# Altium PCB Cubit3_main_pcb.PcbDoc (part 1 of 4)
Units mm, origin at the board's own origin, x right, y up, seen from the top; angles counter-clockwise.
Board outline 58.47 x 70 mm, 4 copper layers (Top Layer, Layer 2, Layer 3, Bottom Layer), stack 0.602 mm thick; 134 components, 100 nets, 451 pads, 313 vias.
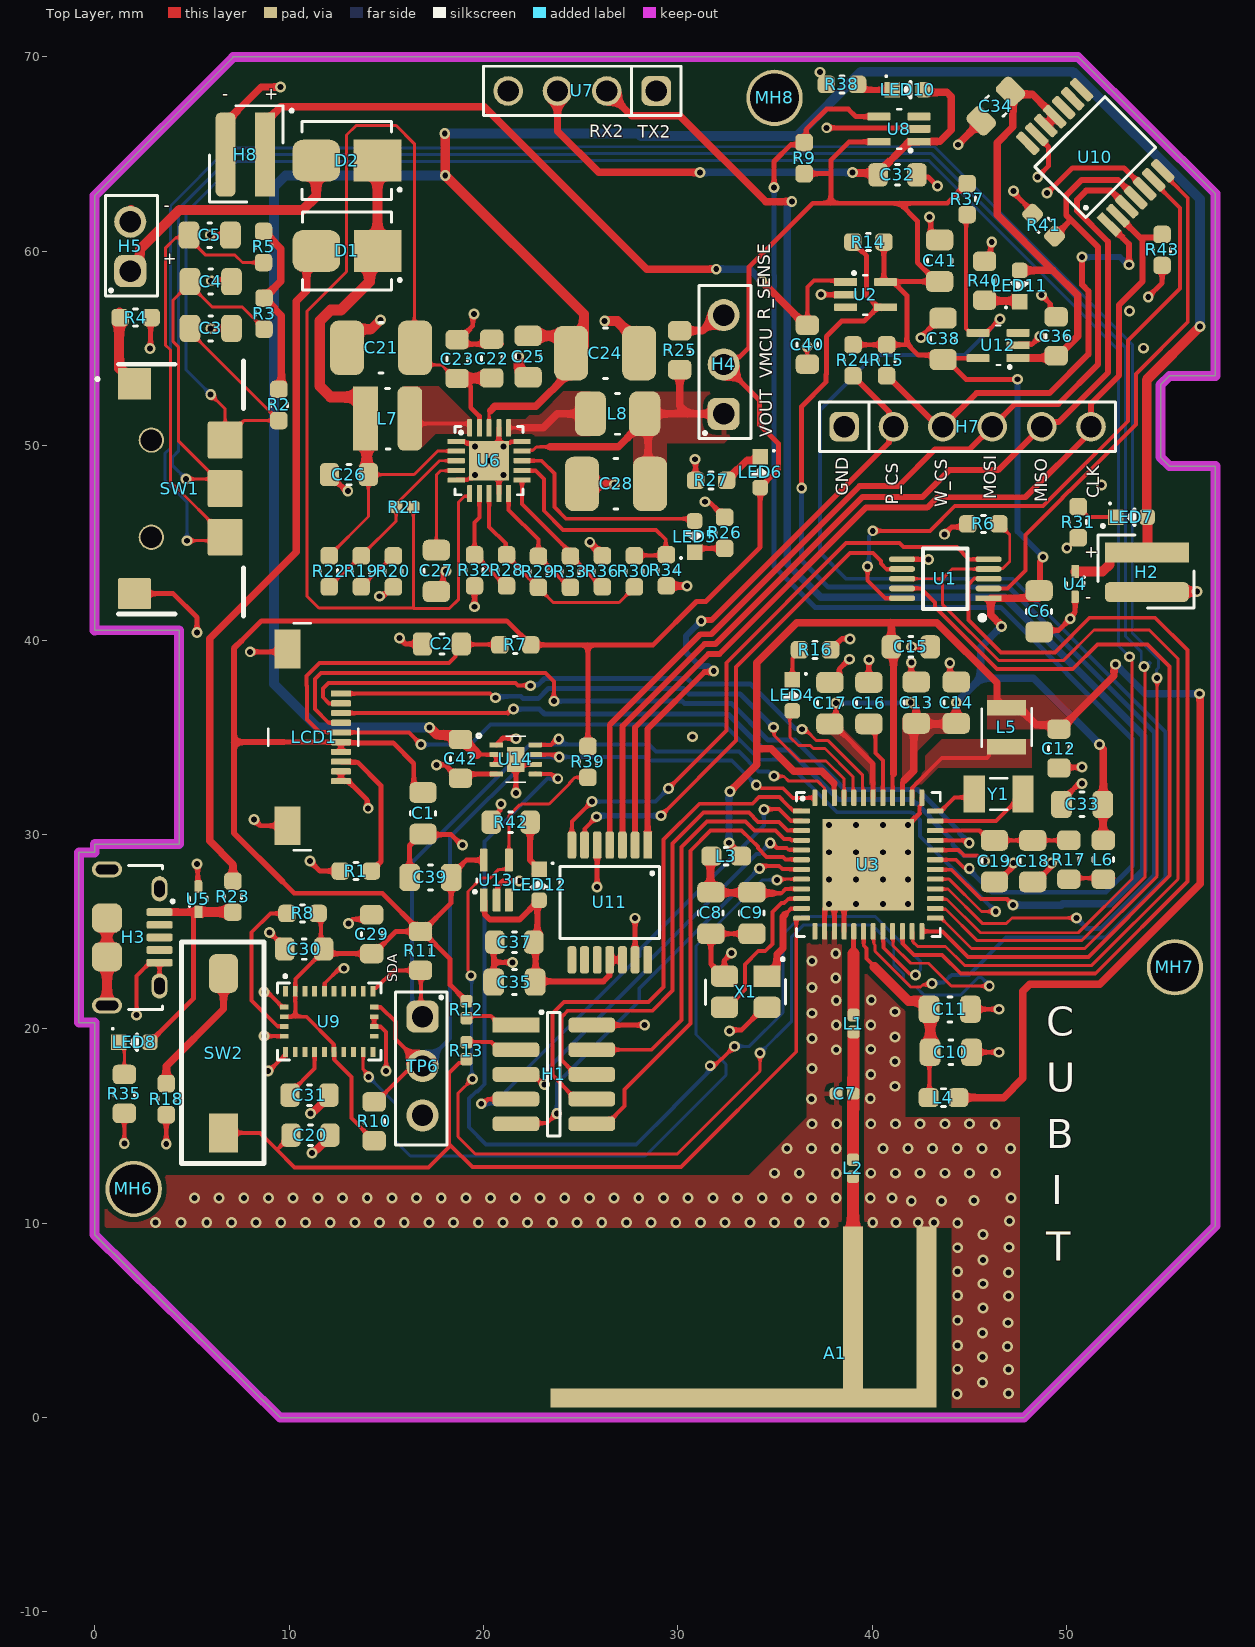
[diagram p0: Top Layer view]
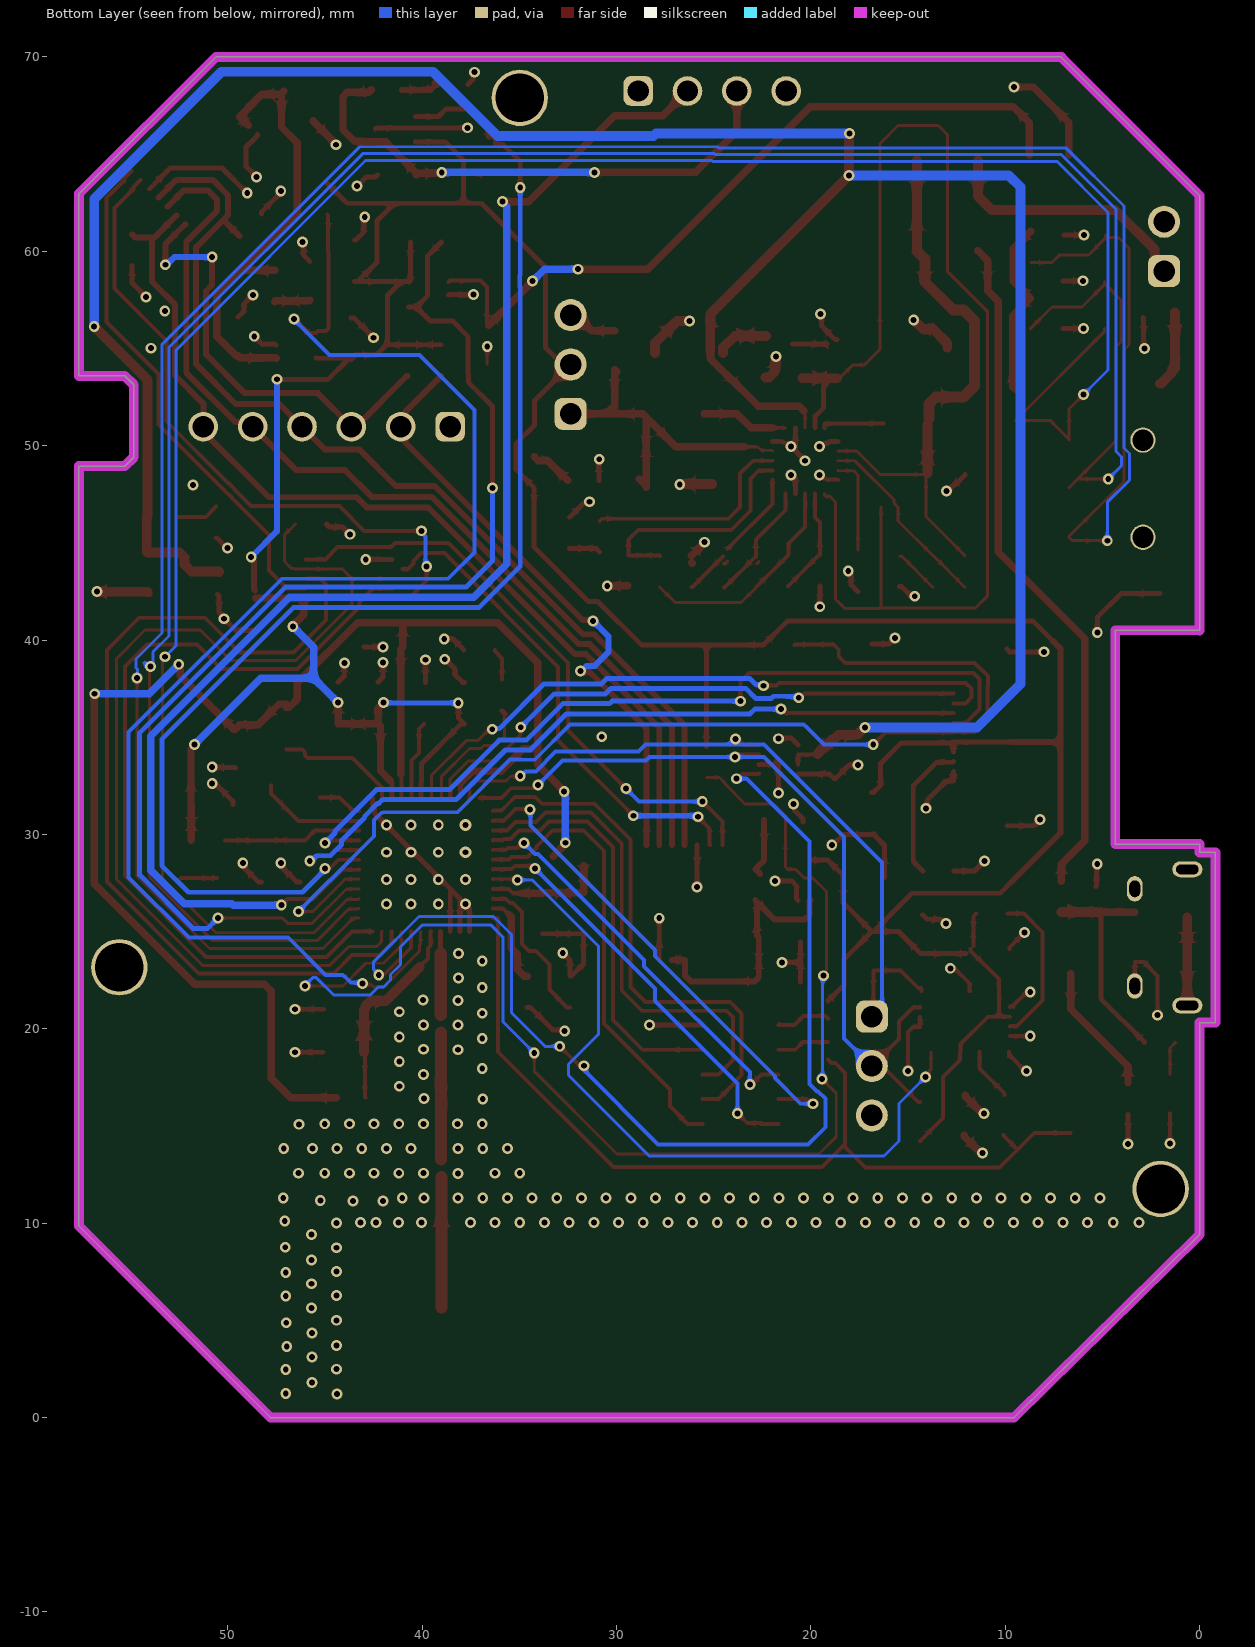
[diagram p1: Bottom Layer view, seen from below]
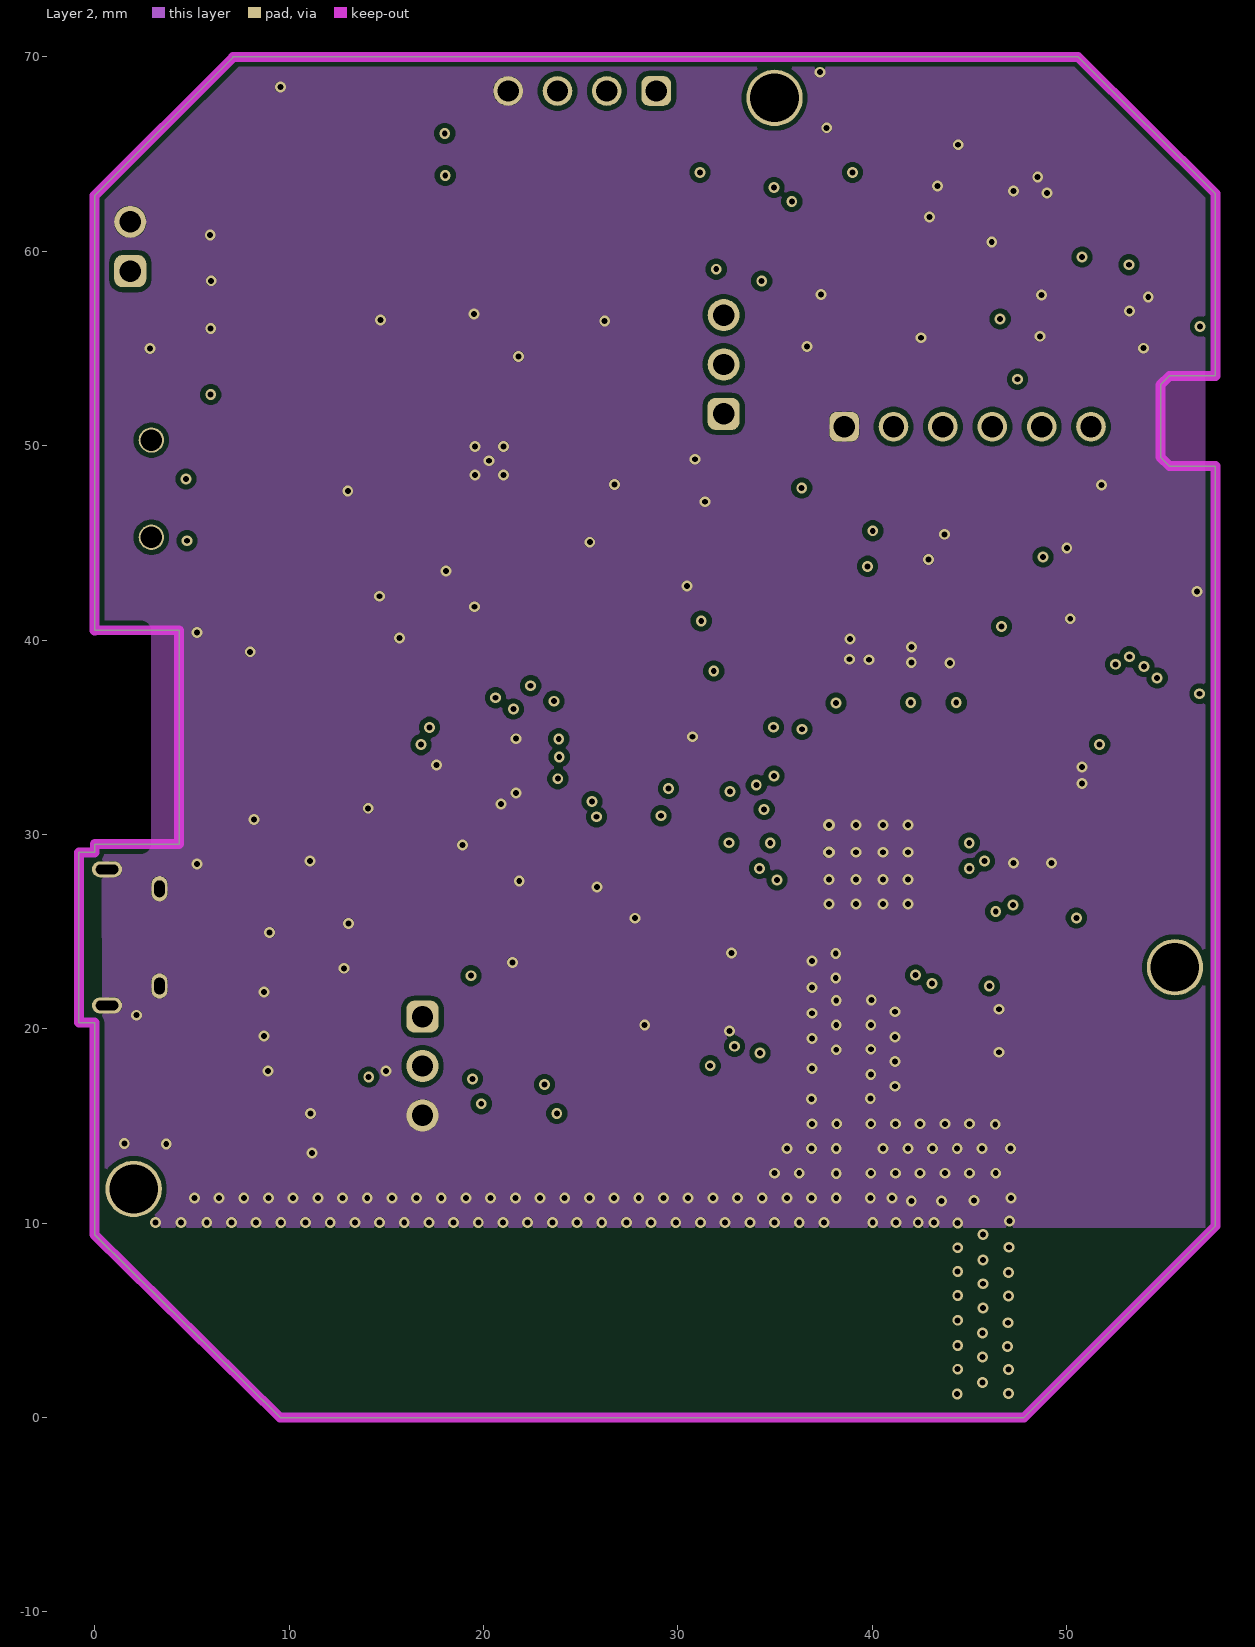
[diagram p2: Layer 2]
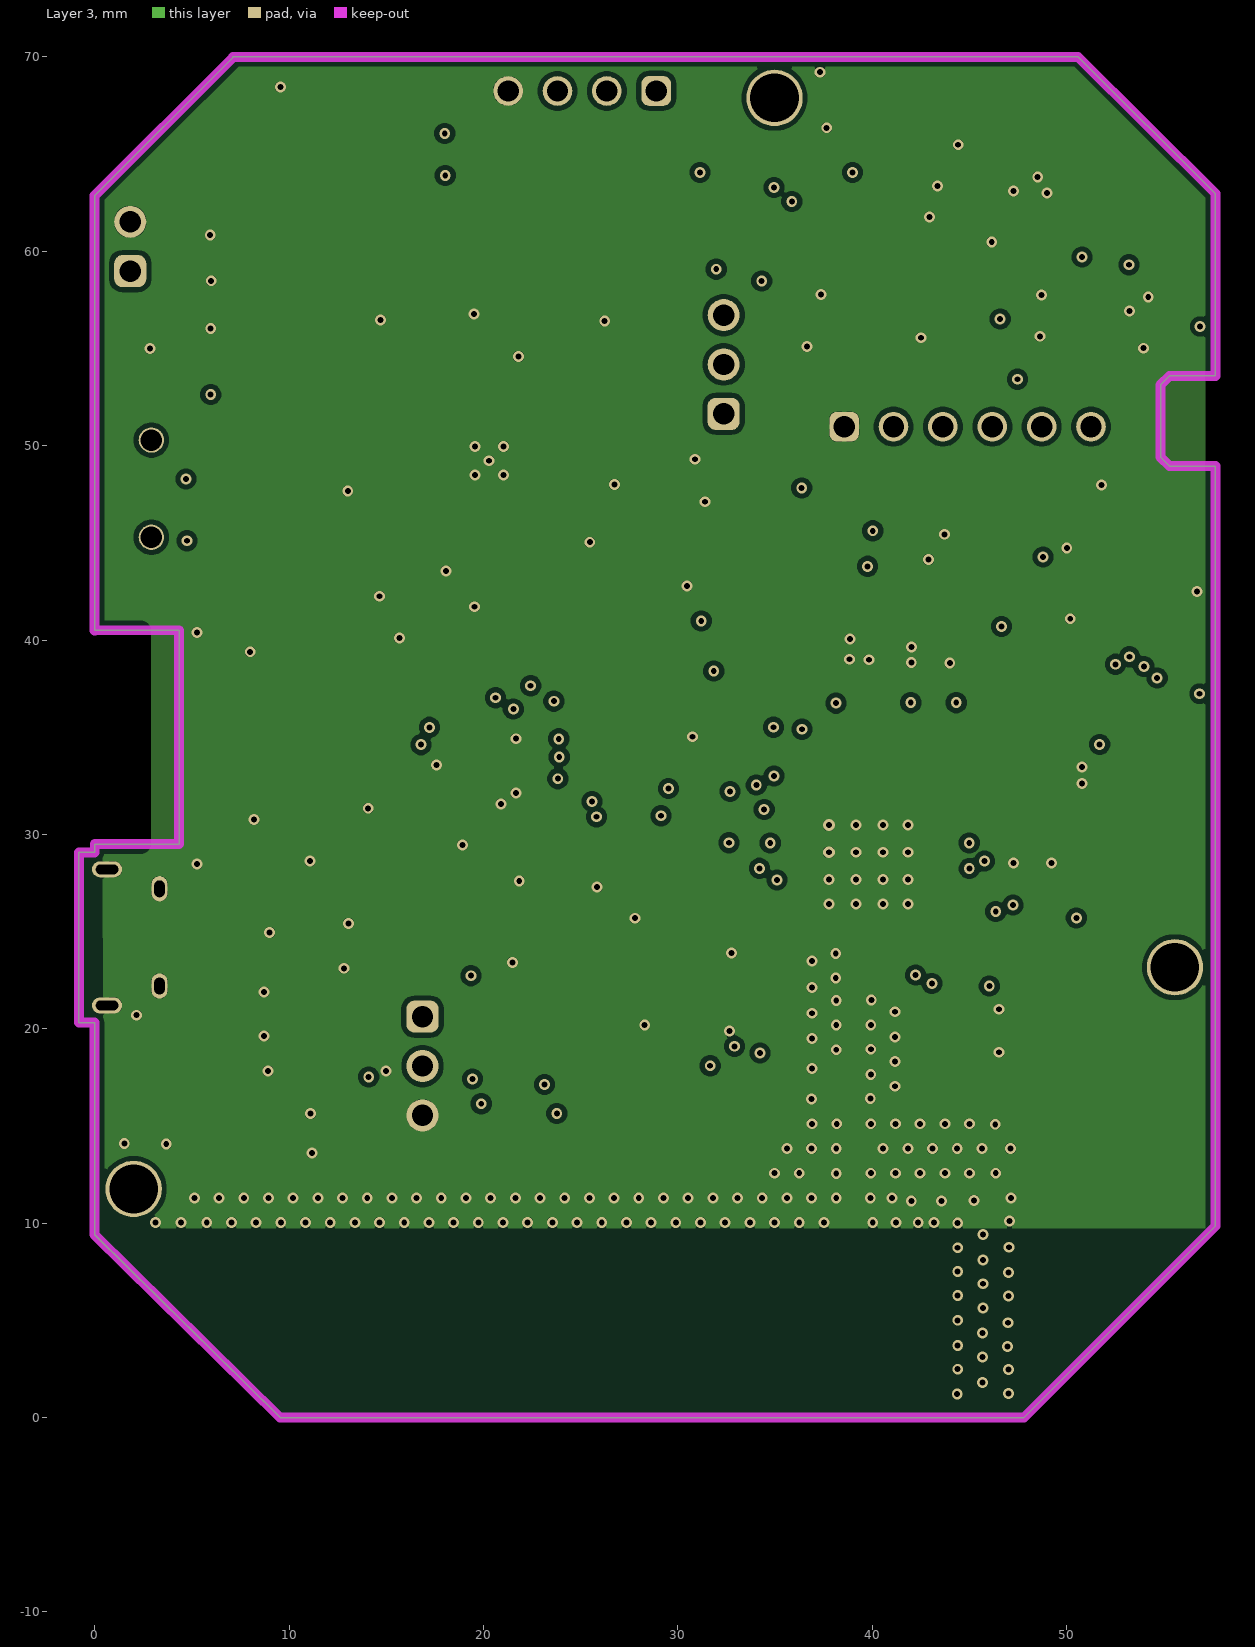
[diagram p3: Layer 3]
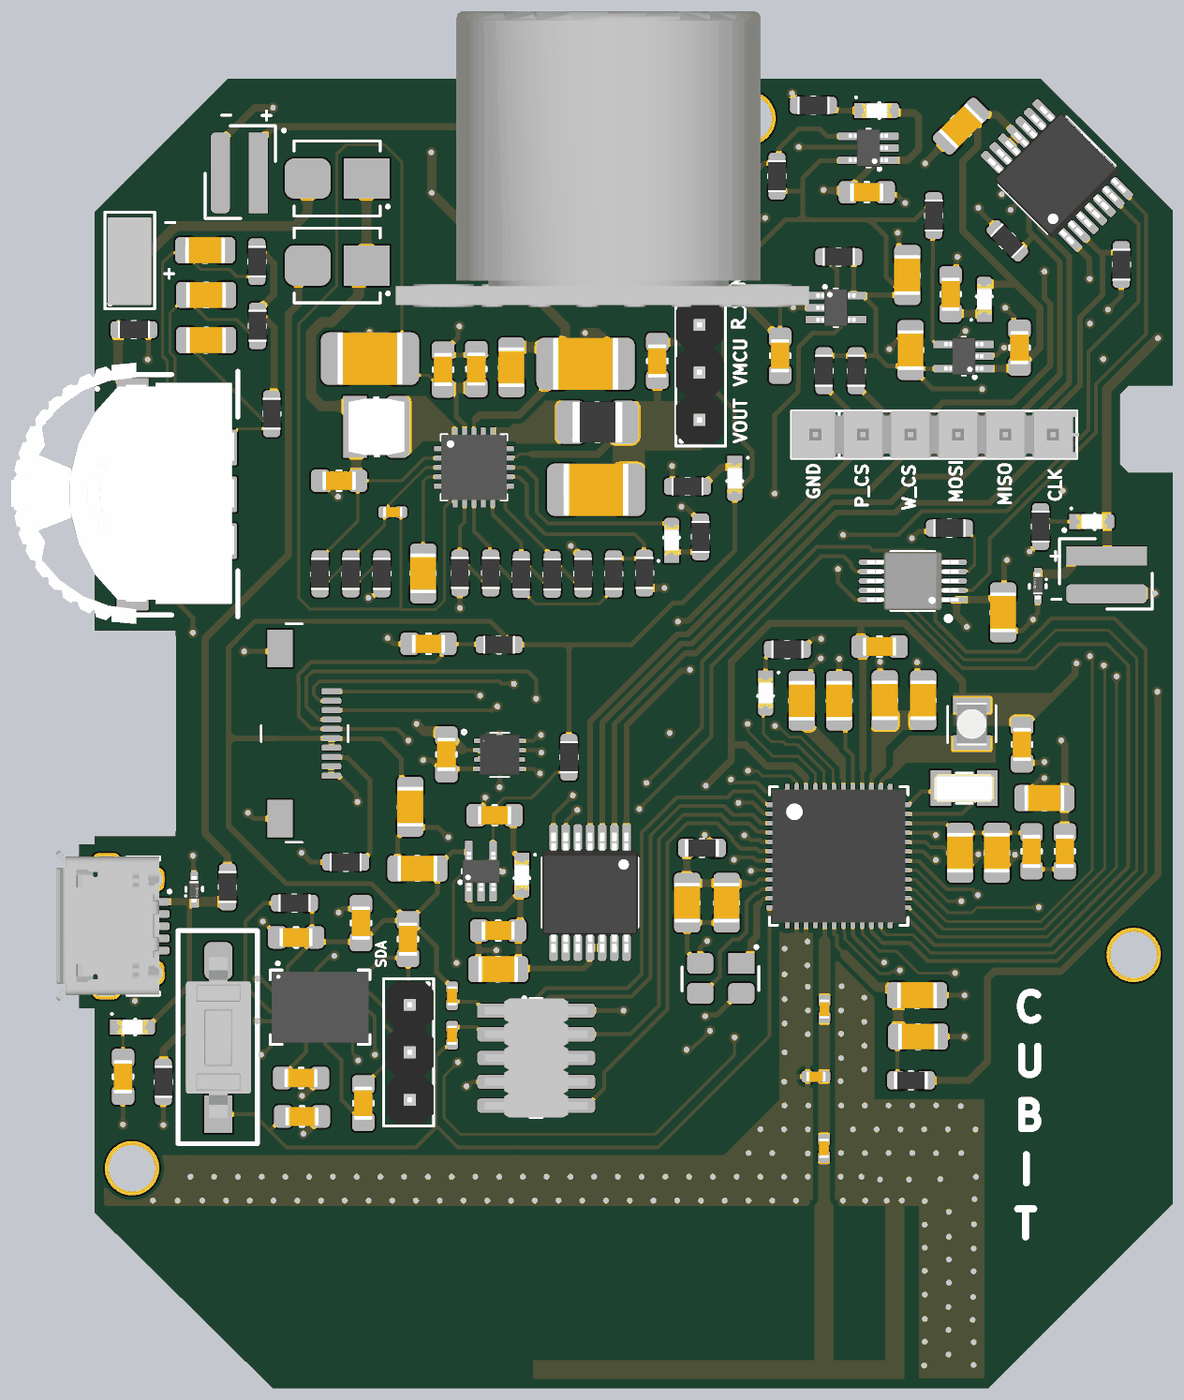
[diagram p5: 3D render of the assembled board from above, using the file's embedded part models]

## Layer stack, top to bottom
Top Solder: solder mask 0.0254, SM-001, Dk 4
Top Layer: signal copper 0.035
Dielectric 1: prepreg 0.0711, PP-006, Dk 4.1
Layer 2: signal copper 0.035
Dielectric 3: core 0.32, Core-004, Dk 4.2
Layer 3: signal copper 0.035
Dielectric 5: prepreg 0.0711, PP-006, Dk 4.1
Bottom Layer: signal copper 0.035
Bottom Solder: solder mask 0.0254, SM-001, Dk 4

## Board outline
0,9.405 0,20.32 -0.813,20.32 -0.813,29.078 0,29.078 0,29.5 4.343,29.5 4.343,40.506 0.008,40.492 0,40.492 0,62.865 7.112,69.977 7.112,70.002 50.546,70.002 50.597,70.002 57.658,62.967 57.658,53.594 55.296,53.594 54.839,53.137 54.839,49.403 55.296,48.946 57.658,48.946 57.658,9.855 47.803,0 9.543,0

## Design rules (kind name [scope] priority, off if disabled: settings)
Clearance [All] p1: gap=0.254 ignorepadtopadclearanceinfootprint=TRUE except(0: Arc-Hole Track-Hole SMDPad-Hole THPad-Hole Via-Hole Fill-Hole Poly-Hole Region-Hole Text-Hole; 0.203: Arc-Arc Arc-Track Track-Track)
PolygonConnect [All vs IsNamedPolygon('FEED_L01_P019')] p1: thpad.connectstyle=Direct thpad.reliefconductorwidth=0.254 thpad.reliefentries=4 thpad.polygonreliefangle="90 Angle" thpad.airgapwidth=0.254 smdpad.connectstyle=Direct smdpad.reliefconductorwidth=0.254 smdpad.reliefentries=4 smdpad.polygonreliefangle="90 Angle" smdpad.airgapwidth=0.254 via.connectstyle=Relief via.reliefconductorwidth=0.254 via.reliefentries=4 via.polygonreliefangle="90 Angle" via.airgapwidth=0.254
PolygonConnect polygon_F_Ant_GND [HasFootprint('F_ANTENNA_FOOTPRINT')] p2: connectstyle=Direct reliefconductorwidth=0.254 reliefentries=4 polygonreliefangle="90 Angle" airgapwidth=0.254
PolygonConnect power_traces [InNetClass('power_class')] p3: thpad.connectstyle=Relief thpad.reliefconductorwidth=0.254 thpad.reliefentries=4 thpad.polygonreliefangle="90 Angle" thpad.airgapwidth=0.254 smdpad.connectstyle=Direct smdpad.reliefconductorwidth=0.254 smdpad.reliefentries=4 smdpad.polygonreliefangle="90 Angle" smdpad.airgapwidth=0.254 via.connectstyle=Relief via.reliefconductorwidth=0.254 via.reliefentries=4 via.polygonreliefangle="90 Angle" via.airgapwidth=0.254
PolygonConnect F_Antenna_plane [IsNamedPolygon('GND_L01_P007')] p4: thpad.connectstyle=Relief thpad.reliefconductorwidth=0.254 thpad.reliefentries=4 thpad.polygonreliefangle="90 Angle" thpad.airgapwidth=0.254 smdpad.connectstyle=Relief smdpad.reliefconductorwidth=0.254 smdpad.reliefentries=4 smdpad.polygonreliefangle="90 Angle" smdpad.airgapwidth=0.254 via.connectstyle=Direct via.reliefconductorwidth=0.254 via.reliefentries=4 via.polygonreliefangle="90 Angle" via.airgapwidth=0.254
RoutingVias [All] p1: holewidth=0.305 width=0.559 viastyle="Through Hole" minholewidth=0.305 minwidth=0.559 maxholewidth=0.305 maxwidth=0.559
SolderMaskExpansion [All] p1: expansion=0.102 istentingtop=FALSE
Width "Schematic Width Constraint_9" [InNet('NetH6_1')] p1: maxlimit=2.54 minlimit=0.254 preferedwidth=0.508 toplayer_minwidth=0.508 midlayer1_maxwidth=0.254 midlayer1_prefwidth=0.254 midlayer2_maxwidth=0.254 midlayer2_prefwidth=0.254 bottomlayer_minwidth=0.508 minimp=50.000000 maximp=50.000000 favimp=50.000000
Width "Schematic Width Constraint_8" [InNet('NetH6_2')] p2: maxlimit=2.54 minlimit=0.254 preferedwidth=0.508 toplayer_minwidth=0.508 midlayer1_maxwidth=0.254 midlayer1_prefwidth=0.254 midlayer2_maxwidth=0.254 midlayer2_prefwidth=0.254 bottomlayer_minwidth=0.508 minimp=50.000000 maximp=50.000000 favimp=50.000000
Width "Schematic Width Constraint_7" [InNet('NetD1_A')] p3: maxlimit=2.54 minlimit=0.152 preferedwidth=0.508 midlayer1_minwidth=0.254 midlayer1_maxwidth=0.254 midlayer1_prefwidth=0.254 midlayer2_minwidth=0.254 midlayer2_maxwidth=0.254 midlayer2_prefwidth=0.254 minimp=50.000000 maximp=50.000000 favimp=50.000000
Width "Schematic Width Constraint_6" [InNet('+3V2_VMCU')] p4: maxlimit=2.54 minlimit=0.152 preferedwidth=0.508 midlayer1_minwidth=0.254 midlayer1_maxwidth=0.254 midlayer1_prefwidth=0.254 midlayer2_minwidth=0.254 midlayer2_maxwidth=0.254 midlayer2_prefwidth=0.254 minimp=50.000000 maximp=50.000000 favimp=50.000000
Width "Schematic Width Constraint_5" [InNet('+3V7_VBAT')] p5: maxlimit=2.54 minlimit=0.152 preferedwidth=0.508 midlayer1_minwidth=0.254 midlayer1_maxwidth=0.254 midlayer1_prefwidth=0.254 midlayer2_minwidth=0.254 midlayer2_maxwidth=0.254 midlayer2_prefwidth=0.254 minimp=50.000000 maximp=50.000000 favimp=50.000000
Width "Schematic Width Constraint_4" [InNet('VOUT')] p6: maxlimit=2.54 minlimit=0.152 preferedwidth=0.508 midlayer1_minwidth=0.254 midlayer1_maxwidth=0.254 midlayer1_prefwidth=0.254 midlayer2_minwidth=0.254 midlayer2_maxwidth=0.254 midlayer2_prefwidth=0.254 minimp=50.000000 maximp=50.000000 favimp=50.000000
Width "Schematic Width Constraint_3" [InNet('VIN_DC')] p7: maxlimit=2.54 minlimit=0.152 preferedwidth=0.508 midlayer1_minwidth=0.254 midlayer1_maxwidth=0.254 midlayer1_prefwidth=0.254 midlayer2_minwidth=0.254 midlayer2_maxwidth=0.254 midlayer2_prefwidth=0.254 minimp=50.000000 maximp=50.000000 favimp=50.000000
Width "Schematic Width Constraint_2" [InNet('LBUCK')] p8: maxlimit=2.54 minlimit=0.152 preferedwidth=0.508 midlayer1_minwidth=0.254 midlayer1_maxwidth=0.254 midlayer1_prefwidth=0.254 midlayer2_minwidth=0.254 midlayer2_maxwidth=0.254 midlayer2_prefwidth=0.254 minimp=50.000000 maximp=50.000000 favimp=50.000000
Width "Schematic Width Constraint_1" [InNet('+5V_VBUS')] p9: maxlimit=2.54 minlimit=0.152 preferedwidth=0.508 midlayer1_minwidth=0.254 midlayer1_maxwidth=0.254 midlayer1_prefwidth=0.254 midlayer2_minwidth=0.254 midlayer2_maxwidth=0.254 midlayer2_prefwidth=0.254 minimp=50.000000 maximp=50.000000 favimp=50.000000
Width "Schematic Width Constraint" [InNet('LBOOST')] p10: maxlimit=2.54 minlimit=0.152 preferedwidth=0.508 midlayer1_minwidth=0.254 midlayer1_maxwidth=0.254 midlayer1_prefwidth=0.254 midlayer2_minwidth=0.254 midlayer2_maxwidth=0.254 midlayer2_prefwidth=0.254 minimp=50.000000 maximp=50.000000 favimp=50.000000
Width [All] p11: maxlimit=2.54 minlimit=0.152 preferedwidth=0.254 toplayer_prefwidth=0.203 midlayer1_minwidth=0.254 midlayer1_maxwidth=0.254 midlayer2_minwidth=0.254 midlayer2_maxwidth=0.254 bottomlayer_prefwidth=0.203 minimp=50.000000 maximp=50.000000 favimp=50.000000
30 further rules are at their usual default settings.

## Classes and differential pairs
net class power_class: +1V8_DCDC +3V2_VMCU +3V2_VMCU_S +3V7_VBAT +5V_VBUS LBOOST LBUCK VBAT_OK VBAT_OV VOUT VREGSW
component class ultrasonic_imu_sensor: C29 C30 C31 C32 C33 C40 C41 H8 LED10 R8 R9 R14 R38 U2 U7 U8 U9
component class solar_cell: MH6 MH7 MH8
component class power_management: C21 C22 C23 C24 C25 C26 C27 C28 C42 D1 D2 H2 H3 H4 H5 L7 L8 LED5 LED6 LED7 LED8 R19 R20 R21 R22 R23 R25 R26 R27 R28 R29 R30 R31 R32 R33 R34 R35 R36 U4 U5 U6 U14
component class Mag_Enc_Sensors_muxed: C6 C34 C35 C36 C37 C38 C39 H7 LED11 LED12 R6 R15 R24 R37 R39 R40 R41 R42 R43 U1 U10 U11 U12 U13
component class efr32_radio_interface: A1 C7 C8 C9 C10 C11 C12 C13 C14 C15 C16 C17 C18 C19 C20 L1 L2 L3 L4 L5 L6 R17 R18 SW2 U3 X1
component class efr32_lcd_hmi: C1 C2 C3 C4 C5 LCD1 R1 R2 R3 R4 R5 R7 SW1
component class efr32_ioport: H1 LED4 R10 R11 R12 R13 R16 TP6 Y1

## Components (designator, comment, footprint, x,y, rotation, side; value= is the part's Value field where it differs from the comment)
A1 "F_ANT" F_ANTENNA_FOOTPRINT 43.256,9.817 r180 top net-tie
C1 "1uF 25V" CAP_0805_02X125 16.891,31.09 r270 top
C2 "0.1uF 16V" CAP_0603_1MM 17.863,39.798 r180 top
C3 "1nF 50V" CAP_0805_02X125 5.969,56.032 r0 top
C4 "1nF 50V" CAP_0805_02X125 5.969,58.445 r0 top
C5 "1nF 50V" CAP_0805_02X125 5.917,60.833 r0 top
C6 "10uF 25V" CAP_0805_02X125 48.59,41.478 r270 top
C7 "1.5pF 50V" CAP_0402_1MM 38.583,16.662 r180 top
C8 "100pF 50V" CAP_0805_02X125 31.699,25.959 r270 top
C9 "10pF 50V" CAP_0805_02X125 33.807,25.959 r270 top
C10 "220nF 50V" CAP_0805_02X125 44.044,18.796 r0 top
C11 "10pF 50V" CAP_0805_02X125 43.993,21.006 r0 top
C12 "4.7uF 10V" CAP_0603_1MM 49.606,34.417 r270 top
C13 "10uF 25V" CAP_0805_02X125 42.266,36.779 r90 top
C14 "1uF 25V" CAP_0805_02X125 44.323,36.779 r90 top
C15 "0.1uF 16V" CAP_0603_1MM 41.986,39.649 r0 top
C16 "1uF 25V" CAP_0805_02X125 39.827,36.754 r90 top
C17 "1uF 25V" CAP_0805_02X125 37.821,36.754 r90 top
C18 "10uF 25V" CAP_0805_02X125 48.26,28.626 r270 top
C19 "10nF 50V" CAP_0805_02X125 46.292,28.626 r270 top
C20 "0.1uF 16V" CAP_0603_1MM 11.1,14.529 r0 top
C21 "220uF 6.3V" CHIP_1210_3.2X2.5 14.735,55.042 r180 top
C22 "4.7uF 10V" CAP_0603_1MM 20.422,54.483 r90 top
C23 "0.1uF 16V" CAP_0603_1MM 18.644,54.458 r90 top
C24 "100uF 10V" CHIP_1210_3.2X2.5 26.264,54.762 r0 top
C25 "10uF 25V" CAP_0805_02X125 22.301,54.585 r270 top
C26 "4.7uF 10V" CAP_0603_1MM 13.08,48.515 r180 top
C27 "10nF 50V" CAP_0805_02X125 17.577,43.561 r270 top
C28 "100uF 10V" CHIP_1210_3.2X2.5 26.822,48.032 r180 top
C29 "0.1uF 16V" CAP_0603_1MM 14.249,24.867 r90 top
C30 "0.1uF 16V" CAP_0603_1MM 10.779,24.105 r180 top
C31 "0.1uF 16V" CAP_0603_1MM 11.049,16.586 r0 top
C32 "0.1uF 16V" CAP_0603_1MM 41.3,63.932 r0 top
C33 "10uF 25V" CAP_0805_02X125 50.8,31.547 r180 top
C34 "10uF 25V" CAP_0805_02X125 46.363,67.47 r225 top
C35 "10uF 25V" CAP_0805_02X125 21.59,22.403 r180 top
C36 "0.1uF 16V" CAP_0603_1MM 49.465,55.628 r90 top
C37 "0.1uF 16V" CAP_0603_1MM 21.59,24.46 r180 top
C38 "10uF 25V" CAP_0805_02X125 43.648,55.498 r90 top
C39 "10uF 25V" CAP_0805_02X125 17.272,27.788 r180 top
C40 "0.1uF 16V" CAP_0603_1MM 36.667,55.194 r270 top
C41 "10uF 25V" CAP_0805_02X125 43.47,59.514 r90 top
C42 "0.1uF 16V" CAP_0603_1MM 18.821,33.884 r270 top
D1 "Schottky Diode" SCHOTTKY4336X33N 12.979,60.02 r180 top
D2 "Schottky Diode" SCHOTTKY4336X33N 12.974,64.668 r180 top
H1 "Debug Port" AMPHENOL_20021121_0 23.622,17.653 r0 top
H2 "Battery Connector" BAT_CONN 54.051,43.459 r0 top
H3 "USB MICRO B RECPT" MICROUSB_AMPHENOL_10118194-0001LF 0.635,24.703 r270 top locked
H4 "PREC003SAAN-RC" 3_PIN_100MIL 32.359,51.639 r90 top value="CONN HEADER VERT 3POS 2.54MM"
H5 "External Power Connector" 2_PIN_100MIL 1.829,58.979 r90 top
H7 "SPI_MAG" 6_PIN_100MIL 44.907,50.978 r0 top
H8 "Laser connector" BAT_CONN 7.722,65.049 r270 top
L1 "1.9nH 1A" CAP_0402_1MM 39.043,20.269 r270 top
L2 "1.9nH 1A" CAP_0402_1MM 39.014,12.827 r270 top
L3 "600ohm 500mA" IND_FERRITE_0603_1.6X0.4 32.487,28.88 r180 top
L4 "600ohm 500mA" IND_FERRITE_0603_1.6X0.4 43.668,16.459 r180 top
L5 "4.7uH 1.4A" INDP2523X23N_4u7 46.914,35.509 r90 top
L6 "1k 200mA" CAP_0603_1MM 51.892,28.702 r270 top
L7 "22uH" 2_IND_3X3 15.074,51.395 r0 top
L8 "10uH 1A" 2_CHIP_2.5X2 26.898,51.639 r0 top
LCD1 "505110-1092_SHARP_LCD" SHARP_LCD 10.671,35 r270 top locked
LED4 "Green" LED_0603_RED_WL-SMCW 35.89,37.16 r270 top
LED5 "150060RS75000" LED_0603_RED_WL-SMCW 30.861,45.326 r90 top
LED6 "150060RS75000" LED_0603_RED_WL-SMCW 34.238,48.642 r270 top
LED7 "150060RS75000" LED_0603_RED_WL-SMCW 53.34,46.33 r0 top
LED8 "150060RS75000" LED_0603_RED_WL-SMCW 2.032,19.304 r0 top
LED10 "Green" LED_0603_RED_WL-SMCW 41.825,68.306 r0 top
LED11 "150060BS75000" LED_0603_RED_WL-SMCW 47.585,58.215 r90 top
LED12 "150060BS75000" LED_0603_RED_WL-SMCW 22.86,27.419 r270 top
MH6 "#4_Hole" HOLE_#4 2.007,11.76 r0 top
MH7 "#4_Hole" HOLE_#4 55.575,23.165 r0 top
MH8 "#4_Hole" HOLE_#4 34.976,67.894 r0 top
R1 "10k 1%" 2_CHIP_0603_RMCF 13.437,28.118 r0 top locked
R2 "1M 1%" 2_CHIP_0603_RMCF 9.474,52.095 r90 top
R3 "1M 1%" 2_CHIP_0603_RMCF 8.712,56.794 r90 top
R4 "100 1%" 2_CHIP_0603_RMCF 2.108,56.591 r0 top
R5 "1M 1%" 2_CHIP_0603_RMCF 8.687,60.223 r90 top
R6 "1M 1%" 2_CHIP_0603_RMCF 45.72,45.974 r0 top
R7 "10k 1%" 2_Chip_0603_RMCF 21.635,39.747 r0 top
R8 "10k 1%" 2_Chip_0603_RMCF 10.693,25.933 r0 top
R9 "10k 1%" 2_Chip_0603_RMCF 36.5,64.795 r270 top
R10 "4.7k 1%" CAP_0603_1MM 14.376,15.24 r90 top
R11 "4.7k 1%" CAP_0603_1MM 16.764,24.007 r270 top
R12 "0 5%" CAP_0402_1MM 19.126,20.98 r270 top
R13 "0 5%" CAP_0402_1MM 19.126,18.872 r90 top
R14 "10k 1%" 2_Chip_0603_RMCF 39.802,60.477 r0 top
R15 "10k 1%" 2_Chip_0603_RMCF 40.742,54.394 r90 top
R16 "1k 1%" 2_CHIP_0603_RMCF 37.059,39.497 r0 top
R17 "1 1%" CAP_0603_1MM 50.114,28.702 r90 top
R18 "100 1%" 2_CHIP_0603_RMCF 3.683,16.383 r90 top
R19 "10M 1%" 2_CHIP_0603_RMCF 13.716,43.536 r270 top
R20 "2M 1%" 2_CHIP_0603_RMCF 15.367,43.536 r270 top
R21 "0 5%" CAP_0402_1MM 15.951,46.838 r0 top
R22 "7.87M 1%" 2_CHIP_0603_RMCF 12.065,43.536 r270 top
R23 "20 1%" 2_CHIP_0603_RMCF 7.112,26.797 r90 top
R24 "10k 1%" 2_Chip_0603_RMCF 39.014,54.394 r90 top
R25 "1 1%" CAP_0603_1MM 30.099,54.915 r270 top
R26 "1k 1%" 2_CHIP_0603_RMCF 32.41,45.518 r270 top
R27 "1k 1%" 2_CHIP_0603_RMCF 31.711,48.21 r180 top
R28 "7.32M 1%" 2_CHIP_0603_RMCF 21.187,43.586 r90 top
R29 "1.43M 1%" 2_CHIP_0603_RMCF 22.832,43.51 r270 top
R30 "8.06M 1%" 2_CHIP_0603_RMCF 27.768,43.536 r270 top
R31 "1k 1%" 2_CHIP_0603_RMCF 50.597,46.063 r270 top
R32 "5.62M 1%" 2_CHIP_0603_RMCF 19.541,43.586 r90 top
R33 "7.32M 1%" 2_CHIP_0603_RMCF 24.477,43.51 r270 top
R34 "4.87M 1%" 2_CHIP_0603_RMCF 29.413,43.586 r90 top
R35 "3k 1%" CAP_0603_1MM 1.524,16.653 r270 top
R36 "4.42M 1%" 2_CHIP_0603_RMCF 26.123,43.536 r270 top
R37 "10k 1%" 2_Chip_0603_RMCF 44.882,62.687 r90 top
R38 "1k 1%" 2_CHIP_0603_RMCF 38.447,68.585 r180 top
R39 "10k 1%" 2_Chip_0603_RMCF 25.375,33.731 r90 top
R40 "3kohm" CAP_0603_1MM 45.782,58.485 r90 top
R41 "10k 1%" 2_Chip_0603_RMCF 48.819,61.341 r315 top
R42 "3kohm" CAP_0603_1MM 21.403,30.632 r180 top
R43 "10k 1%" 2_Chip_0603_RMCF 54.915,60.071 r90 top
SW1 "COM-08184" NAVIGATION_SWITCH 2.916,47.788 r90 top locked
SW2 "Switch" "Reset Sw" 6.629,18.745 r90 top
TP6 "3_pin_test" 3_PIN_100MIL 16.866,20.625 r270 top
U1 "Analog Switch" TSSOP50P490X110-10N 43.761,43.155 r180 top
U2 "Load SW" SOT65P210X110-5N 39.649,57.76 r0 top
U3 "EFR32BG13" 48-QFN_7X7 39.802,28.448 r0 top
U4 "ESD-SP1003" LITTELFUSE_INC_SP1003_MFG 50.444,42.875 r270 top
U5 "ESD-SP1003" LITTELFUSE_INC_SP1003_MFG 5.334,26.67 r90 top
U6 "BQ25570" 21_QFN_35X35 20.294,49.226 r0 top
U7 "Ultrasonic Sensor" 4_PIN_ULTRASONIC_SENSOR 25.079,68.25 r180 top locked
U8 "Load SW" SOT65P210X110-5N 41.393,66.299 r180 top
U9 "BNO005" LGA28R50P4X10_380X520X100 12.065,20.371 r0 top
U10 "AS5047D-ATSM" 14-TSOP_5X4_4 51.476,64.846 r135 top
U11 "AS5047D-ATSM" 14-TSOP_5X4_4 26.5,26.5 r270 top locked
U12 "Load SW" SOT65P210X110-5N 46.493,55.167 r180 top
U13 "Load SW" SOT65P210X110-5N 20.676,27.635 r90 top
U14 "BATT Monitor IC" MAX17048 21.666,33.858 r0 top
X1 "38.4MHz" OSC_38.4MHZ 33.495,21.908 r180 top
Y1 "ECS-.327-7-34B-TR" XTAL_ECS-.327-7-34B-TR 46.507,32.08 r0 top

## Footprints (in the part's own frame and the unit in brackets; to place one, negate y for a bottom-side part, rotate by r counter-clockwise, add the part's x,y. Pads: shape width x height; smd on the part's side, far side on the other; paste and mask are expansions set on the pad)
2_CHIP_2.5X2 [mm]
  rrect50% 1.6x2.3 smd: 1(-1.4,0) 2(1.4,0)
  silkscreen extent -0.1,-1.05 0.1,1.05, body extent -1.35,-1.1 1.35,1.1, height 1.2
2_CHIP_0603_RMCF [mm] "Chip Resistor, 2-Leads, Body 1.55x0.80mm, IPC Medium Density"
  rrect50% 0.9x0.9 smd: 1(-0.8,0) 2(0.8,0)
  silkscreen extent -0.1,-0.44 0.1,0.43, body extent -0.85,-0.48 0.85,0.48, height 0.6
2_Chip_0603_RMCF [mm] "Chip Resistor, 2-Leads, Body 1.55x0.80mm, IPC Medium Density"
  rrect50% 0.9x0.9 smd: 1(-0.8,0) 2(0.8,0)
  silkscreen extent -0.1,-0.44 0.1,0.43, body extent -0.85,-0.48 0.85,0.48, height 0.6
2_IND_3X3 [mil] "Precision Wire Wound Inductor, 2-Leads, Body 3.00x3.00mm, IPC Medium Density"
  rect 50x130 smd: 1(-45,0)
  rrect50% 50x130 smd: 2(45,0)
  silkscreen extent -4,-61 5,61, body extent -59,-59 59,59, height 59
2_PIN_100MIL [mm]
  rrect50% 1.65x1.65 hole 1.1: 1(0,0)
  round 1.65 hole 1.1: 2(2.54,0)
  silkscreen extent -1.27,-1.4 3.89,1.27, body extent -1.07,-1.22 3.61,1.12, height 10.36
3_PIN_100MIL [mm]
  rrect50% 1.65x1.65 hole 1.1: 1(0,0)
  round 1.65 hole 1.1: 2(2.54,0) 3(5.08,0)
  silkscreen extent -1.27,-1.4 6.6,1.27, body extent -1.14,-1.27 6.48,1.27, height 8.38
4_PIN_ULTRASONIC_SENSOR [mil]
  rrect50% 60x60 hole 43.31: 1(-150,0)
  round 60 hole 43.31: 2(-50,0) 3(50,0) 4(150,0)
  silkscreen extent -200,-50 200,50, body extent -517,-211 353,411, height 825
6_PIN_100MIL [mil]
  rrect50% 60x60 hole 43.31: 1(-250,0)
  round 60 hole 43.31: 2(-150,0) 3(-50,0) 4(50,0) 5(150,0) 6(250,0)
  silkscreen extent -300,-50 300,50, body extent -300,-50 305,50, height 331
14-TSOP_5X4_4 [mm] "TSOP, 14-Leads, Body 5.00x4.40mm, Pitch 0.65mm, IPC Medium Density"
  rect 1.4x0.45 smd mask+0.051: 1(-2.95,1.95)
  rrect50% 1.4x0.45 smd mask+0.051: 2(-2.95,1.3) 3(-2.95,0.65) 4(-2.95,0) 5(-2.95,-0.65) 6(-2.95,-1.3) 7(-2.95,-1.95) 8(2.95,-1.95) 9(2.95,-1.3) 10(2.95,-0.65) 11(2.95,0) 12(2.95,0.65) 13(2.95,1.3) 14(2.95,1.95)
  silkscreen extent -1.85,-2.55 1.85,2.55, body extent -3.2,-2.55 3.2,2.55, height 1.2
21_QFN_35X35 [mm]
  rect 2.05x2.05 smd paste-1.025 mask+0.051: 0(0,0)
  rect 0.89x0.26 smd mask+0.051: 1(-1.69,1)
  rrect25% 0.89x0.26 smd mask+0.051: 2(-1.69,0.5) 3(-1.69,0) 4(-1.69,-0.5) 5(-1.69,-1) 11(1.69,-1) 12(1.69,-0.5) 13(1.69,0) 14(1.69,0.5) 15(1.69,1)
  rrect25% 0.26x0.89 smd mask+0.051: 6(-1,-1.69) 7(-0.5,-1.69) 8(0,-1.69) 9(0.5,-1.69) 10(1,-1.69) 16(1,1.69) 17(0.5,1.69) 18(0,1.69) 19(-0.5,1.69) 20(-1,1.69)
  silkscreen extent -1.75,-1.75 1.75,1.75, body extent -1.75,-1.75 1.75,1.75, height 1
48-QFN_7X7 [mm] "QFN, 48-Leads, Body 7.00x7.00mm, Pitch 0.50mm, Thermal Pad 4.70x4.70mm, IPC Medium Density"
  rect 4.7x4.7 smd paste-2.35 mask+0.051: 0(0,0)
  rect 0.86x0.26 smd mask+0.051: 1(-3.435,2.75)
  rrect50% 0.86x0.26 smd mask+0.051: 2(-3.435,2.25) 3(-3.435,1.75) 4(-3.435,1.25) 5(-3.435,0.75) 6(-3.435,0.25) 7(-3.435,-0.25) 8(-3.435,-0.75) 9(-3.435,-1.25) 10(-3.435,-1.75) 11(-3.435,-2.25) 12(-3.435,-2.75) 25(3.435,-2.75) 26(3.435,-2.25) 27(3.435,-1.75) 28(3.435,-1.25) 29(3.435,-0.75) 30(3.435,-0.25) 31(3.435,0.25) 32(3.435,0.75) 33(3.435,1.25) 34(3.435,1.75) 35(3.435,2.25) 36(3.435,2.75)
  rrect50% 0.26x0.86 smd mask+0.051: 13(-2.75,-3.435) 14(-2.25,-3.435) 15(-1.75,-3.435) 16(-1.25,-3.435) 17(-0.75,-3.435) 18(-0.25,-3.435) 19(0.25,-3.435) 20(0.75,-3.435) 21(1.25,-3.435) 22(1.75,-3.435) 23(2.25,-3.435) 24(2.75,-3.435) 37(2.75,3.435) 38(2.25,3.435) 39(1.75,3.435) 40(1.25,3.435) 41(0.75,3.435) 42(0.25,3.435) 43(-0.25,3.435) 44(-0.75,3.435) 45(-1.25,3.435) 46(-1.75,3.435) 47(-2.25,3.435) 48(-2.75,3.435)
  silkscreen extent -3.7,-3.7 3.7,3.7, body extent -3.55,-3.55 3.55,3.55, height 0.9
AMPHENOL_20021121_0 [mm]
  rect 2.4x0.76 smd paste+0 mask+0.051: 1(-1.95,2.54)
  rrect50% 2.4x0.76 smd paste+0 mask+0.051: 2(1.95,2.54) 3(-1.95,1.27) 4(1.95,1.27) 5(-1.95,0) 6(1.95,0) 7(-1.95,-1.27) 8(1.95,-1.27) 9(-1.95,-2.54) 10(1.95,-2.54)
  silkscreen extent -0.71,-3.17 0.33,3.28, body extent -2.75,-3.17 2.75,3.17, height 4.51
BAT_CONN [mil] "2.00MM_PITCH"
  rect 170x40 smd paste+0 mask+2: V+(3,41)
  rrect50% 170x40 smd paste+0 mask+2: V-(3,-39)
  silkscreen extent -96,-71 99,98
CAP_0402_1MM [mm] "1.00x0.5"
  rrect50% 0.66x0.62 smd mask+0.08: 1(-0.44,0) 2(0.44,0)
  body extent -0.53,-0.28 0.53,0.28, height 0.55
CAP_0603_1MM [mm] "Chip Capacitor, 2-Leads, Body 1.60x0.80mm, IPC Medium Density"
  rrect50% 1x1.2 smd: 1(-1,0) 2(1,0)
  silkscreen extent -0.1,-0.53 0.1,0.53, body extent -0.9,-0.5 0.9,0.5, height 1
CAP_0805_02X125 [mil] "Chip Capacitor, 2-Leads, Body 2.00x1.25mm, IPC Medium Density"
  rrect50% 42x55.12 smd: 1(-42,0) 2(42,0)
  silkscreen extent -4,-25 4,25, body extent -42,-28 42,28, height 55
CHIP_1210_3.2X2.5 [mm]
  rrect50% 1.75x2.8 smd: 1(-1.75,0) 2(1.75,0)
  silkscreen extent -0.09,-1.3 0.11,1.3, body extent -1.75,-1.4 1.75,1.4, height 2.8
F_ANTENNA_FOOTPRINT [mil]
  rect 40x331 smd paste-20 mask+0: FEED(167,165.5) GND(18,165.5)
  rect 782x39 smd paste-19.5 mask+0: FEED(389,347)
HOLE_#4 [mm]
  round 2.9 hole 2.5: 1(0,0)
IND_FERRITE_0603_1.6X0.4 [mm] "1.6x0.4x0.8"
  rrect50% 1.03x0.98 smd: 1(-0.76,0) 2(0.76,0)
  silkscreen extent -0.1,-0.46 0.1,0.46, body extent -0.92,-0.48 0.92,0.48, height 0.95
INDP2523X23N_4u7 [mm]
  rect 0.8x2 smd: 1(-1,0) 2(1,0)
  silkscreen extent -1,-1.3 0.99,1.29, body extent -1.14,-0.8 1.14,0.8, height 1.1
LED_0603_RED_WL-SMCW [mm] "SODFL, 2-Leads, Body 0.80x1.80mm, IPC Medium Density"
  rrect50% 0.8x0.8 smd: A(0.8,0)
  rect 0.8x0.8 smd: C(-0.8,0)
  silkscreen extent -1.15,-0.4 0.15,0.75, body extent -0.8,-0.4 0.8,0.4, height 0.7
LGA28R50P4X10_380X520X100 [mm]
  rect 0.25x0.525 smd mask+0.051: 1(-2.25,1.563) 6(-2.25,-1.562) 7(-1.75,-1.562) 8(-1.25,-1.562) 9(-0.75,-1.562) 10(-0.25,-1.562) 11(0.25,-1.562) 12(0.75,-1.562) 13(1.25,-1.562) 14(1.75,-1.562) 15(2.25,-1.562) 20(2.25,1.563) 21(1.75,1.563) 22(1.25,1.563) 23(0.75,1.563) 24(0.25,1.563) 25(-0.25,1.563) 26(-0.75,1.563) 27(-1.25,1.563) 28(-1.75,1.563)
  rect 0.425x0.25 smd mask+0.051: 2(-2.312,0.75) 3(-2.312,0.25) 4(-2.312,-0.25) 5(-2.312,-0.75) 16(2.313,-0.75) 17(2.313,-0.25) 18(2.313,0.25) 19(2.313,0.75)
  silkscreen extent -2.67,-1.98 2.67,2.41, body extent -2.6,-1.9 2.6,1.9, height 1.18
LITTELFUSE_INC_SP1003_MFG [mm]
  rect 0.65x0.4 smd paste+0 mask+0.051: 1(-0.65,0)
  rrect50% 0.65x0.4 smd paste+0 mask+0.051: 2(0.65,0)
  silkscreen extent -0.37,-0.45 0.11,0.47, body extent -0.7,-0.3 0.7,0.3, height 0.65
MAX17048 [mil] "Batteery Monitor"
  rect 35x51 smd mask+2: 0(0,0)
  rect 28x10 smd mask+2: 1(-39.5,29.53)
  rrect50% 28x10 smd mask+2: 2(-39.5,9.84) 3(-39.5,-9.84) 4(-39.5,-29.53) 5(39.5,-29.53) 6(39.5,-9.84) 7(39.5,9.84) 8(39.5,29.53)
  silkscreen extent -79,-46 20,52, body extent -41,-41 41,41, height 32
MICROUSB_AMPHENOL_10118194-0001LF [mm]
  rrect50% 0.4x1.35 smd paste+0 mask+0.102: 1(-1.3,2.7) 2(-0.65,2.7) 3(0,2.7) 4(0.65,2.7) 5(1.3,2.7)
  oval 1.3x0.813 hole 0.55 slot 0.85 at 0 deg: S1(-2.5,2.7) S2(2.5,2.7)
  oval 0.813x1.55 hole 0.5 slot 1.15 at 90 deg: S3(-3.5,0) S6(3.5,0)
  rrect50% 1.5x1.55 smd: S4(-1,0) S5(1,0)
  silkscreen extent -3.7,1.09 3.7,3.45, body extent -4.05,-2.69 4,2.89, height 2.75
NAVIGATION_SWITCH [mm] "SURFACE MOUNT NAVIGATION SWITCH"
  rect 1.6x1.7 smd paste+0 mask+0.051: 1(5.4,0.87)
  rrect10% 1.9x1.8 smd: 2(2.5,-3.8) 3(0,-3.8) 4(-2.5,-3.8)
  rrect10% 1.6x1.7 smd: 5(-5.4,0.87)
  round 1.3 hole 1.1: S1(2.5,0) S2(-2.5,0)
  silkscreen extent -6.54,-4.75 6.58,2.84, body extent -6.93,-4.55 7.03,7.37, height 2.3
OSC_38.4MHZ [mm]
  rect 1.4x1.1 smd: 1(-1.1,-0.8)
  rrect50% 1.4x1.1 smd: 2(1.1,-0.8) 3(1.1,0.8) 4(-1.1,0.8)
  silkscreen extent -2.04,-1.75 2.07,0.67
"Reset Sw" [mm]
  rect 2x1.5 smd: 1(-4.1,0)
  rrect50% 2x1.5 smd: 2(4.1,0)
  silkscreen extent -5.66,-2.08 5.71,2.16, body extent -4.3,-1.75 4.3,1.75, height 4.3
SCHOTTKY4336X33N [mm] "Schottky Diode, 2-Leads, Body 4.31x3.62mm, IPC Medium Density"
  rrect50% 2.45x2.15 smd: A(1.575,0)
  rect 2.45x2.15 smd: C(-1.575,0)
  silkscreen extent -2.79,-2 2.3,2, body extent -2.29,-1.97 2.28,1.97, height 3.3
SHARP_LCD [mm]
  rect 0.32x1.05 smd mask+0.05: 1(-2.246,2)
  rrect50% 0.32x1.05 smd mask+0.052: 2(-1.746,2) 3(-1.246,2) 4(-0.746,2) 5(-0.246,2) 6(0.254,2) 7(0.754,2) 8(1.254,2) 9(1.754,2) 10(2.254,2)
  rect 2x1.35 smd: 11(-4.546,-0.75) 12(4.554,-0.75)
  silkscreen extent -5.87,-1.75 5.82,2.9, body extent -31.47,-4.29 31.47,36.3
SOT65P210X110-5N [mm]
  rect 1.19x0.4 smd mask+0.051: 1(-1.016,0.66)
  rrect25% 1.19x0.4 smd mask+0.051: 2(-1.016,0) 3(-1.016,-0.635) 4(1.041,-0.635) 5(1.041,0.66)
  silkscreen extent -0.66,-1.02 0.1,1.19, body extent -1.05,-1 1.05,1, height 1.1
TSSOP50P490X110-10N [mm] "TSS3A24159_Analog_Switch TSSOP, 10-Leads, Body 3.00x3.00mm, Pitch 0.50mm, IPC Medium Density"
  rect 1.35x0.3 smd mask+0.051: 1(-2.225,1)
  oval 1.35x0.3 smd mask+0.051: 2(-2.225,0.5) 3(-2.225,0) 4(-2.225,-0.5) 5(-2.225,-1) 6(2.225,-1) 7(2.225,-0.5) 8(2.225,0) 9(2.225,0.5) 10(2.225,1)
  silkscreen extent -2.03,-1.55 1.15,2.13, body extent -2.45,-1.55 2.45,1.55, height 1.1
XTAL_ECS-.327-7-34B-TR [mm]
  rect 1.1x1.9 smd: 1(-1.25,0) 2(1.25,0)
  silkscreen extent -0.43,-0.81 0.45,0.81, body extent -1.6,-0.75 1.6,0.75, height 0.9

## Part data
C1 C14 C16 C17: library part GRM216R61E105KA12D, "Cap 1 µF ±10% 25V Ceramic Capacitor X5R 0805 (2012 Metric)", Capacitance=1uF, Case Code (Imperial)=0805, Case Code (Metric)=2012, Dielectric=X5R, Manufacturer=Murata, Max Operating Temperature=85°C, Min Operating Temperature=-55°C, Package Quantity=1, Tolerance=10%, Voltage=25V, Case/Package=0805, Category="Ceramic Capacitors", ComponentLink1Description=https://datasheet.ciiva.com/11787/0900766b80ef921d-11787891.pdf?src-supplier=RSComponents, ComponentLink1URL=https://datasheet.ciiva.com/11787/0900766b80ef921d-11787891.pdf?src-supplier=RSComponents, ComponentLink2Description=https://datasheet.ciiva.com/5424/product-5424880.pdf?src-supplier=Mouser, ComponentLink2URL=https://datasheet.ciiva.com/5424/product-5424880.pdf?src-supplier=Mouser, ComponentLink3Description=https://datasheet.ciiva.com/3777/337grm216r61e105ka1223-3777289.pdf?src-supplier=Arrow+Electronics, ComponentLink3URL=https://datasheet.ciiva.com/3777/337grm216r61e105ka1223-3777289.pdf?src-supplier=Arrow+Electronics, ComponentLink4Description=https://datasheet.ciiva.com/7719/c02e-7719049.pdf?src-supplier=Element14, ComponentLink4URL=https://datasheet.ciiva.com/7719/c02e-7719049.pdf?src-supplier=Element14, ComponentLink5Description=https://datasheet.ciiva.com/22706/1889704-22706791.pdf?src-supplier=Element14, ComponentLink5URL=https://datasheet.ciiva.com/22706/1889704-22706791.pdf?src-supplier=Element14, ComponentLink6Description=https://datasheet.ciiva.com/138/partnumbering-e-01-138518.pdf?src-supplier=Digi-Key, ComponentLink6URL=https://datasheet.ciiva.com/138/partnumbering-e-01-138518.pdf?src-supplier=Digi-Key, ComponentLink7Description=https://datasheet.ciiva.com/138/partnumbering-e-01-138517.pdf?src-supplier=Digi-Key, ComponentLink7URL=https://datasheet.ciiva.com/138/partnumbering-e-01-138517.pdf?src-supplier=Digi-Key, ComponentLink8Description=https://datasheet.ciiva.com/138/partnumbering-e-01-138519.pdf?src-supplier=Digi-Key, ComponentLink8URL=https://datasheet.ciiva.com/138/partnumbering-e-01-138519.pdf?src-supplier=Digi-Key, ComponentLink9Description=https://datasheet.ciiva.com/2989/product-2989638.pdf?src-supplier=Avnet, ComponentLink9URL=https://datasheet.ciiva.com/2989/product-2989638.pdf?src-supplier=Avnet, Construction=Flat, Depth=1.25mm, Height=0.6mm, Lead Free="Lead Free", Length=2mm, Manufacturer Part Number=GRM216R61E105KA12D, Material=Ceramic, Mount="Surface Mount", Number of Pins=2, Packaging="Tape and Reel", Pricing 1="4000=0.09051, 8000=0.08518, 12000=0.08252, 28000=0.07986, 100000=0.06921 (USD)", Radiation Hardening=No, REACH SVHC="No SVHC", RoHS=Yes, RoHS Compliant=Yes, Series=GRM, Stock 1=738438, Supplier 1=Digi-Key, Termination=SMD/SMT, Thickness=0.028inch, Voltage Rating=25V, Voltage Rating (DC)=25V, Width=1.25mm
C2 C15 C20 C23 C29 C30 C31 C32 C36 C37 C40 C42: library part C0805C104K4RACAUTO, "Cap Ceramic 0.1uF 16V X7R 10% SMD 0603 125°C Paper T/R", Capacitance=100nF, Case/Package=0805, Dielectric=X7R, Manufacturer=KEMET, Max Operating Temperature=125°C, Min Operating Temperature=-55°C, Tolerance=10%, Category="Ceramic Capacitors", ComponentLink1Description=http://components.arrow.com/part/dataview/0323_00325188?src-supplier=Arrow+Europe, ComponentLink1URL=http://components.arrow.com/part/dataview/0323_00325188?src-supplier=Arrow+Europe, Depth=1.25mm, Length=2mm, Manufacturer Part Number=C0805C104K4RACAUTO, Packaging="Tape and Reel", Pricing 1="1=0.24000, 10=0.16200, 50=0.09700, 100=0.08190, 500=0.05606, 1000=0.04959 (USD)", RoHS=Yes, RoHS Compliant=Yes, Stock 1=15900, Supplier 1=Digi-Key
C3 C4 C5: library part CL21B102KBANFNC, "1nF ±10% 50V X7R 0805", Capacitance=1nF, Case Code (Imperial)=0805, Case Code (Metric)=2012, Dielectric=X7R, Manufacturer=Samsung, Max Operating Temperature=125°C, Min Operating Temperature=-55°C, Package Quantity=1, Tolerance=10%, Voltage Rating=50V, Case/Package=0805, Category="Ceramic Capacitors", ComponentLink1Description=https://datasheet.ciiva.com/25780/cl21b102kbanfnc-25780808.pdf?src-supplier=Digi-Key, ComponentLink1URL=https://datasheet.ciiva.com/25780/cl21b102kbanfnc-25780808.pdf?src-supplier=Digi-Key, Construction=Flat, Contact Plating=Tin, Depth=1.25mm, Height=0.65mm, Length=0.079inch, Manufacturer Part Number=CL21B102KBANFNC, Mount="Surface Mount", Packaging="Tape and Reel", Pricing 1="1=0.10000, 10=0.04300, 50=0.02360, 100=0.01940, 500=0.01382, 1000=0.01086 (USD)", Radiation Hardening=No, RoHS=Yes, RoHS Compliant=Yes, Series=CL, Stock 1=1056, Supplier 1=Digi-Key, Thickness=0.03inch, Width=0.049inch
C6 C13 C18 C25 C33 C34 C35 C38 C39 C41: library part GRM21BR61E106KA73K, "Cap 0805 25 V 10 uF ±20% Tolerance X5R Monolithic Ceramic Chip Capacitor", Capacitance=10uF, Case/Package=0805, Dielectric=X5R, Manufacturer=Murata, Max Operating Temperature=85°C, Min Operating Temperature=-55°C, Package Quantity=10000, Tolerance=10%, Voltage Rating=25V, Category="Ceramic Capacitors", ComponentLink1Description=http://www.mouser.com/ds/2/281/c02e-2905.pdf?src-supplier=Mouser, ComponentLink1URL=http://www.mouser.com/ds/2/281/c02e-2905.pdf?src-supplier=Mouser, ComponentLink2Description=http://search.murata.co.jp/Ceramy/image/img/A01X/G101/ENG/GRM21BR61E106KA73-01.pdf?src-supplier=Digi-Key, ComponentLink2URL=http://search.murata.co.jp/Ceramy/image/img/A01X/G101/ENG/GRM21BR61E106KA73-01.pdf?src-supplier=Digi-Key, ComponentLink3Description=https://search.murata.co.jp/Ceramy/image/img/A01X/G101/ENG/GRM21BR61E106KA73-01.pdf?src-supplier=Digi-Key, ComponentLink3URL=https://search.murata.co.jp/Ceramy/image/img/A01X/G101/ENG/GRM21BR61E106KA73-01.pdf?src-supplier=Digi-Key, Length=0.079inch, Manufacturer Part Number=GRM21BR61E106KA73K, Mount="Surface Mount", Packaging="Tape and Reel", Pricing 1="1=0.23000, 10=0.15700, 50=0.09400, 100=0.07940, 500=0.05434, 1000=0.04807, 2500=0.04598, 5000=0.04180 (USD)", RoHS=Yes, RoHS Compliant=Yes, Stock 1=1875, Supplier 1=Digi-Key, Thickness=0.055inch, Voltage Rating (DC)=25V, Weight=0.000335oz, Width=0.049inch
C7: library part GCM1555C1H1R5JA16D, "Cap Ceramic 1.5pF 50V C0G 5% Pad SMD 0402 125C Automotive T/R", Capacitance=1.5pF, Case Code (Imperial)=0402, Case Code (Metric)=1005, Manufacturer=Murata, Max Operating Temperature=125°C, Min Operating Temperature=-55°C, Ratings=AEC-Q200, Tolerance=5%, Voltage Rating=50V, Case/Package=0402, Category="Ceramic Capacitors", ComponentLink1Description=http://search.murata.co.jp/Ceramy/image/img/A01X/G101/ENG/GCM1555C1H1R5JA16-01.pdf?src-supplier=Digi-Key, ComponentLink1URL=http://search.murata.co.jp/Ceramy/image/img/A01X/G101/ENG/GCM1555C1H1R5JA16-01.pdf?src-supplier=Digi-Key, Manufacturer Part Number=GCM1555C1H1R5JA16D, Mount="Surface Mount", Packaging="Cut Tape", Pricing 1="1=0.10000, 10=0.04700, 50=0.02580, 100=0.02100, 500=0.01502, 1000=0.01180, 2500=0.01072, 5000=0.00987 (USD)", RoHS=Yes, Stock 1=77943, Supplier 1=Digi-Key
C8: library part CC0805KRX7R9BB101, "Cap 0.1nF ±10% 50V X7R 0805", Capacitance=100pF, Case Code (Imperial)=0805, Case Code (Metric)=2012, Dielectric=X7R, Manufacturer=Yageo, Max Operating Temperature=125°C, Min Operating Temperature=-55°C, Resistor Type=Ceramic, Tolerance=10%, Voltage Rating=50V, Case/Package=0805, Category="Ceramic Capacitors", ComponentLink1Description=https://datasheet.ciiva.com/11465/upy-gphc-x7r-6-3v-to-50v-8-11465306.pdf?src-supplier=Avnet, ComponentLink1URL=https://datasheet.ciiva.com/11465/upy-gphc-x7r-6-3v-to-50v-8-11465306.pdf?src-supplier=Avnet, ComponentLink2Description=https://datasheet.ciiva.com/17436/upy-gphc-x7r-6-3v-to-50v-8-17436651.pdf?src-supplier=Avnet+Europe, ComponentLink2URL=https://datasheet.ciiva.com/17436/upy-gphc-x7r-6-3v-to-50v-8-17436651.pdf?src-supplier=Avnet+Europe, Construction=Flat, Depth=1.25mm, Halogen Free="Halogen Free", Lead Free="Lead Free", Length=2mm, Manufacturer Part Number=CC0805KRX7R9BB101, Mount="Surface Mount", Packaging="Tape and Reel", Pricing 1="1=0.11000, 10=0.08200, 50=0.04620, 100=0.03830, 500=0.02688, 1000=0.02225 (USD)", Radiation Hardening=No, RoHS=Yes, RoHS Compliant=Yes, Series=CC, Stock 1=2346, Supplier 1=Digi-Key, Termination=SMD/SMT, Thickness=0.028inch, Voltage Rating (DC)=50V, Weight=0.000194oz, Width=0.049inch
C9 C11: library part C0805C100K5RACTU, "Cap Ceramic 10pF 50V X7R 10% SMD 0805 125°C Paper T/R", Capacitance=10pF, Case/Package=0805, Dielectric=X7R, Dielectric Material=Ceramic, Manufacturer=KEMET, Tolerance=10%, Voltage Rating (DC)=50V, Category="Ceramic Capacitors", ComponentLink1Description=http://www.farnell.com/datasheets/2747373.pdf?src-supplier=Farnell, ComponentLink1URL=http://www.farnell.com/datasheets/2747373.pdf?src-supplier=Farnell, ComponentLink2Description=http://www.farnell.com/datasheets/2747373.pdf?src-supplier=Newark, ComponentLink2URL=http://www.farnell.com/datasheets/2747373.pdf?src-supplier=Newark, Manufacturer Part Number=C0805C100K5RACTU, Pricing 1="1=0.29000, 10=0.19600, 50=0.11780, 100=0.09950, 500=0.06806, 1000=0.06021 (USD)", RoHS=Yes, RoHS Compliant=Yes, Stock 1=16008, Supplier 1=Digi-Key
C10: library part CC0805KKX7R9BB224, "Cap 220nF ±10% 50V X7R 0805", Capacitance=220nF, Case Code (Imperial)=0805, Case Code (Metric)=2012, Dielectric=X7R, Manufacturer=Yageo, Max Operating Temperature=125°C, Min Operating Temperature=-55°C, Resistor Type=Ceramic, Tolerance=10%, Voltage Rating=50V, Case/Package=0805, Category="Ceramic Capacitors", ComponentLink1Description=https://datasheet.ciiva.com/26862/getdatasheetpartid-403679-26862968.pdf?src-supplier=Verical, ComponentLink1URL=https://datasheet.ciiva.com/26862/getdatasheetpartid-403679-26862968.pdf?src-supplier=Verical, ComponentLink2Description=https://datasheet.ciiva.com/15375/yageo-486313-494411-15375807.pdf?src-supplier=Mouser, ComponentLink2URL=https://datasheet.ciiva.com/15375/yageo-486313-494411-15375807.pdf?src-supplier=Mouser, Construction=Flat, Depth=1.25mm, Halogen Free="Halogen Free", Height=1.25mm, Lead Free="Lead Free", Length=2mm, Manufacturer Part Number=CC0805KKX7R9BB224, Mount="Surface Mount", Packaging="Tape and Reel", Pricing 1="1=0.18000, 10=0.12600, 50=0.07140, 100=0.05920, 500=0.04154, 1000=0.03439 (USD)", Radiation Hardening=No, RoHS=Yes, RoHS Compliant=Yes, Series=CC, Stock 1=57217, Supplier 1=Digi-Key, Termination=SMD/SMT, Thickness=0.057inch, Voltage Rating (DC)=50V, Weight=0.000194oz, Width=0.049inch
C12 C22 C26: library part CL10A475KP8NNNC, "Cap CL10 Series 4.7 uF 10 V ±10 % Tolerance X5R SMT Multilayer Ceramic Capacitor", Capacitance=4.7uF, Case Code (Imperial)=0603, Case Code (Metric)=1608, Dielectric=X5R, Manufacturer=Samsung, Max Operating Temperature=85°C, Min Operating Temperature=-55°C, Package Quantity=1, Tolerance=10%, Voltage Rating=10V, Case/Package=0603, Category="Ceramic Capacitors", ComponentLink1Description=https://datasheet.ciiva.com/25797/cl10a475kp8nnnc-25797520.pdf?src-supplier=Digi-Key, ComponentLink1URL=https://datasheet.ciiva.com/25797/cl10a475kp8nnnc-25797520.pdf?src-supplier=Digi-Key, ComponentLink2Description=https://datasheet.ciiva.com/26838/getdatasheetpartid-358676-26838384.pdf?src-supplier=Verical, ComponentLink2URL=https://datasheet.ciiva.com/26838/getdatasheetpartid-358676-26838384.pdf?src-supplier=Verical, ComponentLink3Description=https://datasheet.ciiva.com/16318/cl05b104kq5nnnc-16318245.pdf?src-supplier=Future+Electronics, ComponentLink3URL=https://datasheet.ciiva.com/16318/cl05b104kq5nnnc-16318245.pdf?src-supplier=Future+Electronics, Construction=Flat, Contact Plating=Tin, Depth=0.8mm, Height=0.8mm, Length=1.6mm, Manufacturer Part Number=CL10A475KP8NNNC, Mount="Surface Mount", Packaging="Tape and Reel", Pricing 1="1=0.10000, 10=0.04700, 50=0.02580, 100=0.02110, 500=0.01506, 1000=0.01183 (USD)", Radiation Hardening=No, RoHS=Yes, RoHS Compliant=Yes, Series=CL, Stock 1=5517923, Supplier 1=Digi-Key, Thickness=0.035inch, Width=0.031inch
C19 C27: library part CL21B103KBCNNNC, "Cap 10nF ±10% 50V X7R 0805", Capacitance=10nF, Case Code (Imperial)=0805, Case Code (Metric)=2012, Dielectric=X7R, Manufacturer=Samsung, Max Operating Temperature=125°C, Min Operating Temperature=-55°C, Tolerance=10%, Voltage Rating=50V, Case/Package=0805, Category="Ceramic Capacitors", ComponentLink1Description=https://datasheet.ciiva.com/26920/getdatasheetpartid-640087-26920198.pdf?src-supplier=Verical, ComponentLink1URL=https://datasheet.ciiva.com/26920/getdatasheetpartid-640087-26920198.pdf?src-supplier=Verical, ComponentLink2Description=https://datasheet.ciiva.com/26787/cl21b103kbcnnnc-26787008.pdf?src-supplier=IIIC, ComponentLink2URL=https://datasheet.ciiva.com/26787/cl21b103kbcnnnc-26787008.pdf?src-supplier=IIIC, Construction=Flat, Contact Plating=Tin, Depth=1.25mm, Height=0.85mm, Lead Free="Lead Free", Length=2mm, Manufacturer Part Number=CL21B103KBCNNNC, Mount="Surface Mount", Packaging="Tape and Reel", Pricing 1="1=0.10000, 10=0.05000, 50=0.02700, 100=0.02210, 500=0.01578, 1000=0.01240 (USD)", Radiation Hardening=No, RoHS=Yes, RoHS Compliant=Yes, Series=CL, Stock 1=358475, Supplier 1=Digi-Key, Thickness=0.037inch, Voltage Rating (DC)=50V, Width=0.049inch
C21: library part GRM32ER60J227ME05L, "Cap 220uF 6.3volts X5R 20%", Capacitance=220uF, Dielectric=X5R, Manufacturer=Murata, Tolerance=20%, Voltage Rating (DC)=6.3V, Category="Ceramic Capacitors", ComponentLink1Description=http://www.farnell.com/datasheets/2867883.pdf?src-supplier=Farnell, ComponentLink1URL=http://www.farnell.com/datasheets/2867883.pdf?src-supplier=Farnell, ComponentLink2Description=http://www.farnell.com/datasheets/2867883.pdf?src-supplier=Newark, ComponentLink2URL=http://www.farnell.com/datasheets/2867883.pdf?src-supplier=Newark, ComponentLink3Description=http://search.murata.co.jp/Ceramy/image/img/A01X/G101/ENG/GRM32ER60J227ME05-01.pdf?src-supplier=Digi-Key, ComponentLink3URL=http://search.murata.co.jp/Ceramy/image/img/A01X/G101/ENG/GRM32ER60J227ME05-01.pdf?src-supplier=Digi-Key, ComponentLink4Description=https://search.murata.co.jp/Ceramy/image/img/A01X/G101/ENG/GRM32ER60J227ME05-01.pdf?src-supplier=Digi-Key, ComponentLink4URL=https://search.murata.co.jp/Ceramy/image/img/A01X/G101/ENG/GRM32ER60J227ME05-01.pdf?src-supplier=Digi-Key, Length=3.2mm, Manufacturer Part Number=GRM32ER60J227ME05L, Pricing 1="1=1.62000, 10=1.27900, 50=1.10820, 100=0.95910, 500=0.72462 (USD)", RoHS=Yes, RoHS Compliant=Yes, Stock 1=877, Supplier 1=Digi-Key, Thickness=2.5mm, Width=2.5mm
C24 C28: library part CL32A107MPVNNNE, "Cap 100uF ±20% 10V X5R 1210", Capacitance=100uF, Case Code (Imperial)=1210, Case Code (Metric)=3225, Dielectric=X5R, Manufacturer=Samsung, Max Operating Temperature=85°C, Min Operating Temperature=-55°C, Tolerance=20%, Voltage=10V, Case/Package=1210, Category="Ceramic Capacitors", ComponentLink1Description=https://datasheet.ciiva.com/26947/getdatasheetpartid-468228-26947022.pdf?src-supplier=Verical, ComponentLink1URL=https://datasheet.ciiva.com/26947/getdatasheetpartid-468228-26947022.pdf?src-supplier=Verical, Contact Plating=Tin, Depth=2.5mm, Height=2.5mm, Lead Free="Lead Free", Length=3.2mm, Manufacturer Part Number=CL32A107MPVNNNE, Material=Ceramic, Mount="Surface Mount", Packaging="Tape and Reel", Pricing 1="1=1.14000, 10=0.86800, 50=0.72080, 100=0.62070, 500=0.48056 (USD)", Radiation Hardening=No, RoHS=Yes, RoHS Compliant=Yes, Stock 1=174637, Supplier 1=Digi-Key, Thickness=0.11inch, Voltage Rating=10V, Voltage Rating (DC)=10V, Width=0.098inch
D1 D2: library part LSM115JE3/TR13, "LSM115J Series 15 V 1 A Surface Mount Schottky Rectifier - DO-214BA", Manufacturer=Microchip, Manufacturer Part Number=LSM115JE3/TR13, Pricing 1="1=0.51000 (USD)", RoHS=Yes, Stock 1=16365, Supplier 1=Digi-Key
H1: library part 20021121-00010C1LF, "CONN HEADER SMD 10POS 1.27MM. Connector Header Surface Mount 10 position 0.050\"", Manufacturer="Amphenol ICC / FCI", Category="Headers and Wire Housings", Manufacturer Part Number=20021121-00010C1LF, RoHS=No, Supplier 1=Digi-Key
H2: library part 0554600272, "2.00mm Pitch Mi ll System Wire-to-Board Header, Surface Mount, Single Row, Vertical, 2 Circuits", Color=Natural, Manufacturer=Molex, Max Operating Temperature=105°C, Max Voltage Rating (AC)=125V, Min Operating Temperature=-40°C, Category="Headers and Wire Housings", ComponentLink1Description=https://datasheet.ciiva.com/18487/554600272-sd-18487017.pdf?src-supplier=Digi-Key, ComponentLink1URL=https://datasheet.ciiva.com/18487/554600272-sd-18487017.pdf?src-supplier=Digi-Key, ComponentLink2Description=https://datasheet.ciiva.com/18487/554600272-sd-18487018.pdf?src-supplier=Digi-Key, ComponentLink2URL=https://datasheet.ciiva.com/18487/554600272-sd-18487018.pdf?src-supplier=Digi-Key, ComponentLink3Description=https://datasheet.ciiva.com/18487/554600272-sd-18487019.pdf?src-supplier=Digi-Key, ComponentLink3URL=https://datasheet.ciiva.com/18487/554600272-sd-18487019.pdf?src-supplier=Digi-Key, Connector Type="Male Pin", Contact Material=Bronze, Contact Plating=Tin,Copper, Depth=7mm, Housing Color=Natural, Housing Material=Polyamide, Length=8.1mm, Manufacturer Part Number=0554600272, Mount="Surface Mount", Number of Positions=2, Number of Rows=1, Orientation=Straight, Packaging="Tape and Reel", Pitch=0.079inch, Pricing 1="1=1.33000, 10=1.10500, 100=0.92040 (USD)", RoHS=Yes, RoHS Compliant=Yes, Stock 1=5247, Supplier 1=Digi-Key, Termination=Solder
H3: library part 10118194-0001LF, "USB - micro B USB 2.0 Receptacle Connector 5 Position Surface Mount, Right Angle; Through Hole", Color=Black, Current Rating=1.8A, Flammability Rating="UL94 V-0", Insulation Resistance=1GR, Manufacturer="Amphenol FCI", Max Operating Temperature=85°C, Max Voltage Rating (AC)=100V, Min Operating Temperature=-55°C, Package Quantity=9600, Supplier Part Number 1=609-4618-6-ND, Category="USB Connectors", ComponentLink1Description=https://datasheet.ciiva.com/4598/10118194ac-197217-4598807.pdf?src-supplier=Mouser, ComponentLink1URL=https://datasheet.ciiva.com/4598/10118194ac-197217-4598807.pdf?src-supplier=Mouser, ComponentLink2Description=https://datasheet.ciiva.com/26945/getdatasheetpartid-418619-26945695.pdf?src-supplier=Verical, ComponentLink2URL=https://datasheet.ciiva.com/26945/getdatasheetpartid-418619-26945695.pdf?src-supplier=Verical, ComponentLink3Description=https://datasheet.ciiva.com/851/10118194-851110.pdf?src-supplier=Digi-Key, ComponentLink3URL=https://datasheet.ciiva.com/851/10118194-851110.pdf?src-supplier=Digi-Key, ComponentLink4Description=https://datasheet.ciiva.com/851/10118194-851111.pdf?src-supplier=Digi-Key, ComponentLink4URL=https://datasheet.ciiva.com/851/10118194-851111.pdf?src-supplier=Digi-Key, Connector Type=USB,Receptacle, Contact Material="Copper Alloy", Contact Plating=Gold, Depth=5mm, Features=Shielded, Gender=Receptacle, Housing Material=Polymer, Lead Free="Lead Free", Length=8.05mm, Manufacturer Part Number=10118194-0001LF, Mount="Surface Mount,Horizontal", Number of Contacts=5, Number of Ports=1, Number of Terminals/Pins=5, Orientation="Right Angle", Packaging="Tape and Reel", Pitch=0.65mm, Pricing 1="1=0.48000, 10=0.45100, 25=0.38680, 50=0.32860, 100=0.31580, 250=0.28360, 500=0.27070 (USD)", Radiation Hardening=No, RoHS=Yes, Stock 1=87961, Supplier 1=Digi-Key, Termination=Solder
H4: library part SW_3Pin_100mil_Switch, "Connector Header Through Hole 3 position 0.100\" (2.54mm)", LCSC Part#=C429954, Digikey Link=https://www.digikey.com/product-detail/en/PREC003SAAN-RC/S1012EC-03-ND/2774851/?itemSeq=304982371, Digikey Part=S1012EC-03-ND, Type=Extended
H5: library part ext_pwr_conn
H7: library part 6_pin_connector
H8: library part batt_conn_pad, "2.00mm Pitch"
L1 L2: library part LQG15WZ1N9S02D, "Inductor Chip 1.9nH 0.3nH Tolerance 2-Pin 0402 Paper T/R", Manufacturer=Murata, Category="Fixed Inductors", Manufacturer Part Number=LQG15WZ1N9S02D, Pricing 1="1=0.14000, 10=0.12900, 25=0.11440, 50=0.09720, 100=0.08580, 250=0.07864, 500=0.07150, 1000=0.06006, 2500=0.05148 (USD)", RoHS=Yes, RoHS Compliant=Yes, Stock 1=7252, Supplier 1=Digi-Key
L3 L4: library part BLM18AG601SN1D, "Ferrite Beads 0603 600Ω ±25% DCR=0.38Ω 500mA", Case Code (Imperial)=0603, Case Code (Metric)=1608, Current Rating=500mA, DC Resistance (DCR)=380mR, Frequency=100MHz, Manufacturer=Murata, Max Operating Temperature=125°C, Min Operating Temperature=-55°C, Package Quantity=1, Tolerance=25%, Case/Package=0603, Category=Inductors, ComponentLink1Description=https://datasheet.ciiva.com/19460/1844766-19460213.pdf?src-supplier=Jameco, ComponentLink1URL=https://datasheet.ciiva.com/19460/1844766-19460213.pdf?src-supplier=Jameco, ComponentLink2Description=https://datasheet.ciiva.com/41449/001172228-da-01-en-drossel-0603-600r-1-6x0-8mm-4000st-41449517.pdf?src-supplier=Conrad, ComponentLink2URL=https://datasheet.ciiva.com/41449/001172228-da-01-en-drossel-0603-600r-1-6x0-8mm-4000st-41449517.pdf?src-supplier=Conrad, ComponentLink3Description=https://datasheet.ciiva.com/29347/442309-da-01-en-chip-drossel-0603-600r-500ma-1-6x0-8mm-29347900.pdf?src-supplier=Conrad, ComponentLink3URL=https://datasheet.ciiva.com/29347/442309-da-01-en-chip-drossel-0603-600r-500ma-1-6x0-8mm-29347900.pdf?src-supplier=Conrad, ComponentLink4Description=https://datasheet.ciiva.com/1466/1756147-1466934.pdf?src-supplier=Element14, ComponentLink4URL=https://datasheet.ciiva.com/1466/1756147-1466934.pdf?src-supplier=Element14, ComponentLink5Description=https://datasheet.ciiva.com/1466/1756147-1466933.pdf?src-supplier=Element14, ComponentLink5URL=https://datasheet.ciiva.com/1466/1756147-1466933.pdf?src-supplier=Element14, ComponentLink6Description=https://datasheet.ciiva.com/1012/l0110s0100blm18a-1012018.pdf?src-supplier=Digi-Key, ComponentLink6URL=https://datasheet.ciiva.com/1012/l0110s0100blm18a-1012018.pdf?src-supplier=Digi-Key, ComponentLink7Description=https://datasheet.ciiva.com/1012/l0110s0100blm18a-1012017.pdf?src-supplier=Digi-Key, ComponentLink7URL=https://datasheet.ciiva.com/1012/l0110s0100blm18a-1012017.pdf?src-supplier=Digi-Key, ComponentLink8Description=https://datasheet.ciiva.com/1012/l0110s0100blm18a-1012019.pdf?src-supplier=Digi-Key, ComponentLink8URL=https://datasheet.ciiva.com/1012/l0110s0100blm18a-1012019.pdf?src-supplier=Digi-Key, ComponentLink9Description=https://datasheet.ciiva.com/16210/l0110s0100blm18a-16210006.pdf?src-supplier=Future+Electronics, ComponentLink9URL=https://datasheet.ciiva.com/16210/l0110s0100blm18a-16210006.pdf?src-supplier=Future+Electronics, ComponentLink10Description=https://datasheet.ciiva.com/3081/l0110s0100blm18a-3081613.pdf?src-supplier=Avnet, ComponentLink10URL=https://datasheet.ciiva.com/3081/l0110s0100blm18a-3081613.pdf?src-supplier=Avnet, Core Material=Ferrite, DC Current=500mA, Depth=0.8mm, Height=0.8mm, Impedance=600R, Lead Free="Lead Free", Length=1.6mm, Manufacturer Part Number=BLM18AG601SN1D, Material=Steel,Ferrite, Max Current Rating=500mA, Max DC Current=500mA, Military Standard=Not, Number of Circuits=1, Number of Lines=1, Number of Pins=2, Packaging="Tape and Reel", Pricing 1="1=0.10000, 10=0.07900, 25=0.07200, 50=0.06480, 100=0.04760, 250=0.03460, 500=0.03170, 1000=0.02738 (USD)", Radiation Hardening=No, REACH SVHC="No SVHC", RoHS=Yes, RoHS Compliant=Yes, Shielding=Unshielded, Supplier 1=Digi-Key, Termination=SMD/SMT, Test Frequency=100MHz, Weight=7.1E-05oz, Width=0.8mm